# EAGLE board RobotPCB (EAGLE 9.2.2)
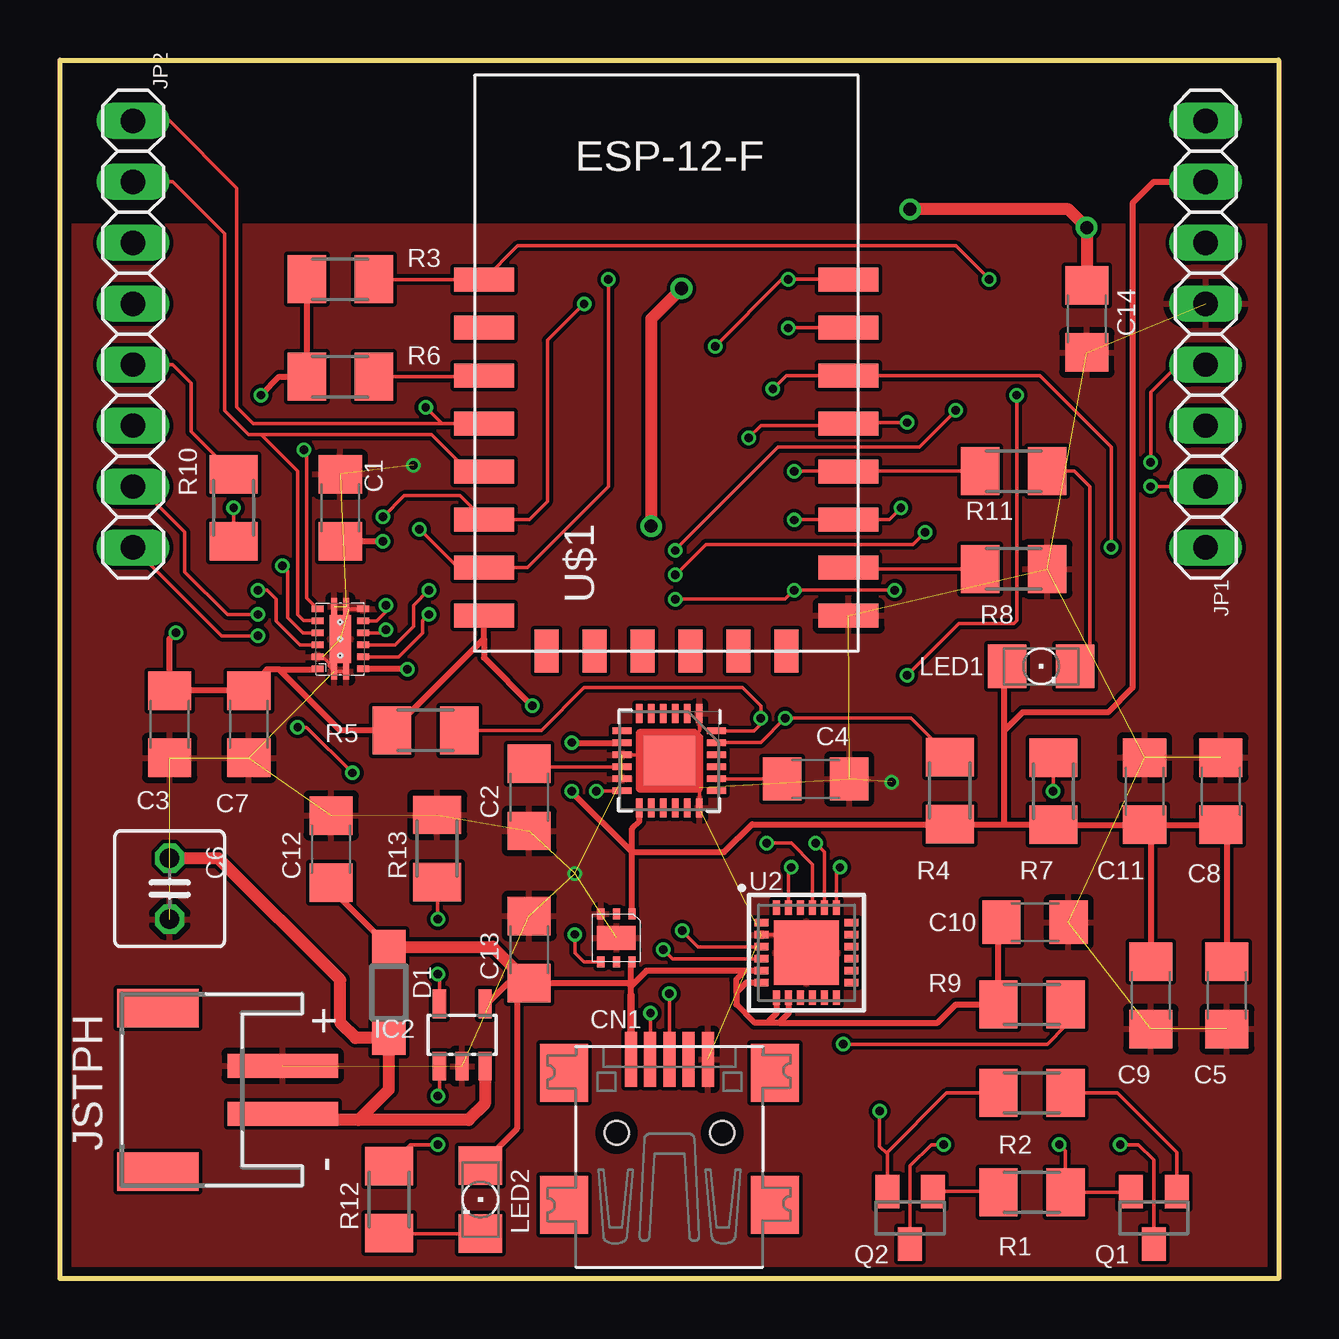
[diagram p0: board, top side]
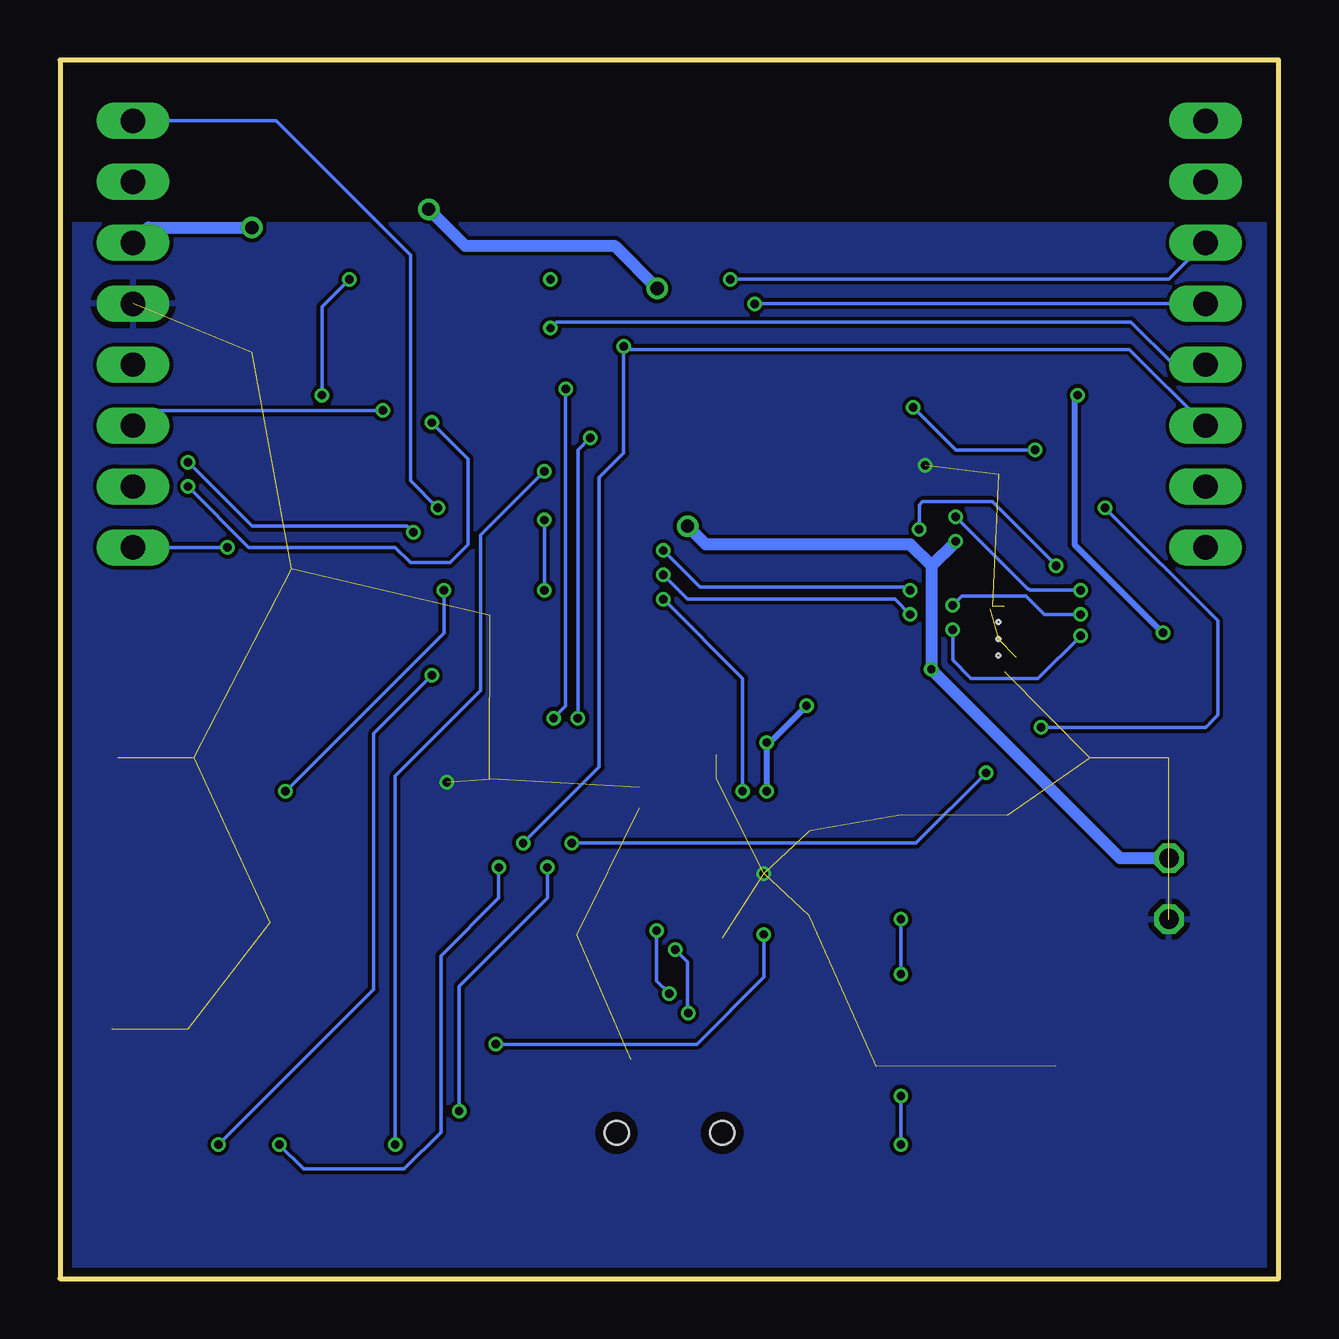
[diagram p1: board, bottom side, seen from below]

Size 50.8 x 50.8 mm. Coordinates in mm from the lower left corner, seen from the top.
Outline: 0,0 0,50.8 50.8,50.8 50.8,0 0,0
Copper layers (1*16): Top 0.035559375mm / dielectric 1.6mm / Bottom 0.035559375mm
Design rules "2layer": minimum track width 6mil, minimum drill 10mil, track to track 6mil, track to pad 6mil, pad to pad 6mil, via to via 6mil, smd to smd 6mil, copper to edge 15mil, drill to drill 6mil, minimum pad ring 5mil, minimum via ring 5mil, stop-mask expansion 2.5mil, vias tented up to drill 0mil, thermal gap 10mil

## Footprints (pad centres in the part's own frame; a part is rotated, then mirrored left to right if it is on the bottom)
C1206 = smd 1.6 x 1.8: 1 -1.4,0; 2 1.4,0
C025-050X050 = drill 0.813 octagon: 1 -1.27,0; 2 1.27,0
USB-MINIB = smd 0.5 x 2.308: D+ 0,4.064; D- -0.8,4.064; GND 1.6,4.064; ID 0.8,4.064; VBUS -1.6,4.064 | smd 2 x 2.4: GND1 -4.4,-2; GND2 -4.4,3.5; GND3 4.4,3.5; GND4 4.4,-2 | hole 1: -2.2,1; 2.2,1
SOD123 = smd 1.4 x 1.4: A 1.9,0; C -1.9,0
QFN50P400X400X95-25T265X275N = smd 0.26 x 0.79: 1 -1.25,-1.97; 2 -0.75,-1.97; 3 -0.25,-1.97; 4 0.25,-1.97; 5 0.75,-1.97; 6 1.25,-1.97; 13 1.25,1.97; 14 0.75,1.97; 15 0.25,1.97; 16 -0.25,1.97; 17 -0.75,1.97; 18 -1.25,1.97 | smd 0.79 x 0.26: 7 1.97,-1.25; 8 1.97,-0.75; 9 1.97,-0.25; 10 1.97,0.25; 11 1.97,0.75; 12 1.97,1.25; 19 -1.97,1.25; 20 -1.97,0.75; 21 -1.97,0.25; 22 -1.97,-0.25; 23 -1.97,-0.75; 24 -1.97,-1.25 | smd 2.15 x 2.05: 25 0,0
SOT23-5L = smd 0.55 x 1.2: 1 -0.95,-1.3; 2 0,-1.3; 3 0.95,-1.3; 4 0.95,1.3; 5 -0.95,1.3
1X08 = drill 1.016 long: 1 -8.89,0; 2 -6.35,0; 3 -3.81,0; 4 -1.27,0; 5 1.27,0; 6 3.81,0; 7 6.35,0; 8 8.89,0
JST-PH-2-SMT-RA = smd 1 x 4.6: 1 1,-3.7; 2 -1,-3.7 | smd 1.6 x 3.4: NC1 -3.4,1.5; NC2 3.4,1.5
1206 = smd 1.6 x 1.803: A -1.422,0; C 1.422,0
SOT23 = smd 1 x 1.4: 1 -0.95,-1.1; 2 0.95,-1.1; 3 0,1.1
M1206 = smd 1.6 x 2: 1 -1.4,0; 2 1.4,0
WSON_2X3 = smd 0.28 x 0.5: 1 -1.25,-0.95; 2 -0.75,-0.95; 3 -0.25,-0.95; 4 0.25,-0.95; 5 0.75,-0.95; 6 1.25,-0.95; 7 1.25,0.95; 8 0.75,0.95; 9 0.25,0.95; 10 -0.25,0.95; 11 -0.75,0.95; 12 -1.25,0.95 | smd 2 x 0.9: PAD 0,0 | smd 0.7 x 0.25: PAD1 -1.35,0.25; PAD2 -1.35,-0.25; PAD3 1.35,-0.25; PAD4 1.35,0.25 | hole 0.15: 0,0; -0.7,0; 0.7,0
QFN-24-4X4 = smd 0.6 x 0.3: 1 -1.875,1.25; 2 -1.875,0.75; 3 -1.875,0.25; 4 -1.875,-0.25; 5 -1.875,-0.75; 6 -1.875,-1.25; 13 1.875,-1.25; 14 1.875,-0.75; 15 1.875,-0.25; 16 1.875,0.25; 17 1.875,0.75; 18 1.875,1.25 | smd 0.3 x 0.6: 7 -1.25,-1.875; 8 -0.75,-1.875; 9 -0.25,-1.875; 10 0.25,-1.875; 11 0.75,-1.875; 12 1.25,-1.875; 19 1.25,1.875; 20 0.75,1.875; 21 0.25,1.875; 22 -0.25,1.875; 23 -0.75,1.875; 24 -1.25,1.875 | smd 2.7 x 2.7: PAD 0,0
ESP8266-ESP12 = smd 2.5 x 1: 1 0.4,15.48; 2 0.4,13.48; 3 0.4,11.48; 4 0.4,9.48; 5 0.4,7.48; 6 0.4,5.48; 7 0.4,3.48; 8 0.4,1.48; 15 15.6,1.48; 16 15.6,3.48; 17 15.6,5.48; 18 15.6,7.48; 19 15.6,9.48; 20 15.6,11.48; 21 15.6,13.48; 22 15.6,15.48 | smd 1 x 1.8: 9 3,0; 10 5,0; 11 7,0; 12 9,0; 13 11,0; 14 13,0
WSON-6 = smd 0.45 x 0.3: 1 0,1.65; 2 0,1; 3 0,0.35; 4 2,0.35; 5 2,1; 6 2,1.65 | smd 1 x 1.6: 7 1,1

## Placement (x,y rotation side)
C1  0.1 uF  [C1206]  11.68,32.13 90 top
C2  0.1 uF  [C1206]  19.56,20.07 270 top
C3  0.1 uF  [C1206]  4.57,23.11 270 top
C4  2.2 nF  [C1206]  31.5,20.83 0 top
C5  0.1 uF  [C1206]  48.64,11.81 270 top
C6  1.0 uF  [C025-050X050]  4.57,16.26 270 top
C7  10 nF  [C1206]  7.87,23.11 270 top
C8  0.1 uF  [C1206]  48.39,20.32 90 top
C9  10 uF  [C1206]  45.47,11.81 270 top
C10  1 uF  [C1206]  40.64,14.86 0 top
C11  1 uF  [C1206]  45.21,20.32 90 top
C12  1 uF  [C1206]  11.3,17.91 90 top
C13  10 uF  [C1206]  19.56,13.72 90 top
C14  10 uF  [C1206]  42.8,40.01 270 top
CN1  [USB-MINIB]  25.4,5.08 0 top
D1  MBR120HW  [SOD123]  13.72,11.94 270 top
IC1  MPU6050  [QFN50P400X400X95-25T265X275N]  25.4,21.59 180 top
IC2  MCP73831/OT  [SOT23-5L]  16.76,10.16 0 top
JP1  [1X08]  47.75,39.37 90 top
JP2  [1X08]  3.05,39.37 270 top
JSTPH  [JST-PH-2-SMT-RA]  5.59,7.87 90 top
LED1  [1206]  40.89,25.53 0 top
LED2  [1206]  17.53,3.3 270 top
Q1  [SOT23]  45.59,2.54 180 top
Q2  [SOT23]  35.43,2.54 180 top
R1  10ki  [M1206]  40.51,3.61 0 top
R2  10k  [M1206]  40.51,7.75 180 top
R3  10k  [M1206]  11.68,41.66 180 top
R4  3.3K  [M1206]  37.08,20.35 270 top
R5  3.3K  [M1206]  15.24,22.86 180 top
R6  10k  [M1206]  11.68,37.59 180 top
R7  10k  [M1206]  41.4,20.32 90 top
R8  4.7k  [M1206]  39.75,29.59 180 top
R9  10k  [M1206]  40.51,11.43 0 top
R10  1k  [M1206]  7.24,32.13 90 top
R11  1k  [M1206]  39.75,33.66 180 top
R12  1k  [M1206]  13.72,3.3 90 top
R13  2k  [M1206]  15.72,17.93 90 top
U1  DRV8835  [WSON_2X3]  11.68,26.67 90 top
U2  CP2104-F03-GM  [QFN-24-4X4]  31.11,13.59 0 top
U$1  ESP8266_ESP-12  [ESP8266-ESP12]  17.27,26.16 0 top
U$2  TLV757P  [WSON-6]  22.19,15.21 270 top

## Library data of the parts
C1-C14 = rcl; SPICEPREFIX: C
CN1 IC2 JSTPH LED1 = adafruit
D1 = diode
IC1 = invensense
JP1 JP2 = pinhead
LED2 = led
Q1 Q2 = semicon-smd-ipc
R1-R13 = rcl; SPICEPREFIX: R
U1 = bt_motordriver
U2 = silicon_labs
U$1 = ESP8266-ESP12
U$2 = ECE5780-MotorDriver

## Nets
ADC: U$1.2
DTR: Q2.2 R2.2 U2.23
EN: R6.1 U$1.3
GND: C1.2 C2.2 C3.2 C4.2 C5.2 C6.2 C7.2 C8.2 C9.2 C10.2 C11.2 C12.2 C13.2 C14.2 CN1.GND IC1.1 IC1.9 IC1.11 IC1.18 IC1.25 IC2.2 JP1.5 JSTPH.1 R8.1 R13.2 U1.6 U1.11 U1.PAD U1.PAD1 U1.PAD2 U1.PAD3 U1.PAD4 U2.2 U2.PAD U$1.15 U$2.3 U$2.7
GPIO0: Q2.3 R11.2 U$1.18
GPIO2: IC1.12 JP1.8 R7.2 U$1.17
GPIO4: IC1.24 JP1.2 R5.1 U$1.19
GPIO5: IC1.23 JP1.1 R4.1 U$1.20
GPIO12: JP2.4 U1.10 U$1.6
GPIO13: JP2.3 U1.9 U$1.7
GPIO14: JP2.2 U1.8 U$1.5
GPIO16: JP2.1 U1.7 U$1.4
MOUTA1: JP1.4 U1.2
MOUTA2: JP1.3 U1.3
MOUTB1: JP2.8 U1.4
MOUTB2: JP2.7 U1.5
N$1: C4.1 IC1.20
N$2: Q1.1 R2.1
N$3: R9.2 U$2.4
N$4: CN1.D+ U2.3
N$5: Q2.1 R1.1
N$7: CN1.D- U2.4
N$8: LED1.C R11.1
N$9: IC2.5 R13.1
N$10: IC2.1 R12.2
N$11: LED2.C R12.1
N$23: R8.2 U$1.16
REGOUT: C2.1 IC1.10
RESET: Q1.3 R3.1 U$1.1
RTS: Q1.2 R1.2 U2.19
RXD: JP2.5 R10.2 U$1.21
TXD: JP2.6 U2.20 U$1.22
USB_RX: R10.1 U2.21
VBAT: C1.1 C6.1 C14.1 D1.A IC2.3 JP1.6 JSTPH.2 U1.1
VBUS: C10.1 C12.1 C13.1 CN1.VBUS D1.C IC2.4 LED2.A R9.1 U2.5 U2.6 U2.7 U2.8 U$2.6
VCC: C3.1 C5.1 C7.1 C8.1 C9.1 C11.1 IC1.8 IC1.13 JP1.7 LED1.A R3.2 R4.2 R5.2 R6.2 R7.1 U1.12 U$1.8 U$2.1

## Tracks (layer width: path | path; a pad name or v marks a point on that pad's centre or on a via)
DTR  (via drill 0.35)
  Top 0.152: R2.2 36.96,7.75 34.48,5.27 34.48,5.21 | U2.23 30.36,17.03 v30.48,17.14 | v34.16,6.99 34.16,5.53 34.48,5.21 | 34.48,5.21 Q2.2
  Bottom 0.152: v30.48,17.14 30.48,15.88 34.16,12.19 v34.16,6.99
EN
  Top 0.152: R6.1 17.62,37.59 U$1.3
GND  (via drill 0.35)  (32 unrouted)
  Top 0.152: IC1.9 25.15,21.84 IC1.25 25.46,21.65 | IC1.1 26.65,22.84 25.46,21.65 | IC1.18 26.65,20.47 25.46,21.65 | U2.2 30.36,14.34 U2.PAD | U1.11 10.95,25.92 11.21,25.66 11.21,25.54 U1.PAD1 U1.PAD2 | U1.6 12.03,27.92 U1.PAD3
  other vias: 34.67,20.7 21.46,16.89 14.73,33.91
  pour Top: 0,0 0,43.94 50.8,43.94 50.8,0
  pour Bottom: 0,0 0,43.94 50.8,43.94 50.8,0
GPIO0  (via drill 0.35)
  Top 0.152: v36.83,5.59 36.32,5.59 35.43,4.7 Q2.3 | R11.2 32.88,33.66 U$1.18 32.86,33.66 v30.61,33.66
  Bottom 0.152: v36.83,5.59 36.83,20.95 33.27,24.51 33.27,30.99 v30.61,33.66
GPIO2  (via drill 0.35)
  Top 0.152: IC1.12 22.37,20.34 v22.35,20.32 | v35.05,32.13 34.56,31.64 U$1.17 30.63,31.64 v30.61,31.62 | R7.2 v41.4,20.32 | v25.65,28.32 30.23,28.32 v30.61,28.7 v34.8,28.7
  Bottom 0.152: v35.05,32.13 36.2,33.27 36.2,42.67 41.78,48.26 JP1.8 | v22.35,20.32 22.35,25.02 v25.65,28.32 | v30.61,28.7 v30.61,31.62 | v41.4,20.32 34.8,26.92 v34.8,28.7
GPIO4  (via drill 0.35)
  Top 0.152: IC1.24 28.94,22.84 29.21,23.11 v29.21,23.37 29.21,23.88 28.45,24.64 21.84,24.64 20.07,22.86 R5.1 | v28.7,35.05 29.21,35.56 32.79,35.56 U$1.19 32.92,35.69 v35.31,35.69 | JP1.2 v45.47,33.02
  Bottom 0.152: v28.7,35.05 29.21,34.54 v29.21,23.37 | v45.47,33.02 42.93,30.48 36.83,30.48 36.2,29.84 34.54,29.84 33.78,30.61 33.78,34.16 v35.31,35.69
GPIO5  (via drill 0.35)
  Top 0.152: IC1.23 27.38,22.35 29.21,22.35 v30.23,23.37 35.46,23.37 R4.1 | v29.72,37.08 30.28,37.64 U$1.20 40.84,37.64 43.81,34.67 v43.81,30.48
  Bottom 0.152: v29.72,37.08 29.72,23.88 v30.23,23.37 | v43.81,30.48 JP1.1
GPIO12  (via drill 0.35)
  Top 0.152: U1.10 10.01,26.42 9.02,27.42 9.02,28.32 8.64,28.7 v8.26,28.7 | v13.46,31.75 14.35,32.64 16.68,32.64 U$1.6 19.58,31.64 20.32,32.38 20.32,39.12 v21.84,40.64
  Bottom 0.152: v8.26,28.7 10.36,28.7 10.41,28.75 10.46,28.75 v13.46,31.75 | JP2.4 v21.84,40.64
GPIO13  (via drill 0.35)
  Top 0.152: U1.9 10.48,26.92 10.13,26.92 9.49,27.57 9.49,29.5 v9.27,29.72 | v14.99,31.24 16.59,29.64 U$1.7 19.48,29.64 22.86,33.02 v22.86,41.66
  Bottom 0.152: v9.27,29.72 11.94,32.38 14.86,32.38 14.99,32.26 v14.99,31.24 | JP2.3 4.57,41.66 v22.86,41.66
GPIO14
  Top 0.152: JP2.2 4.7,45.72 6.86,43.56 6.86,36.2 7.87,35.18 8.38,35.18 | 8.38,35.18 15.49,35.18 17.03,33.64 U$1.5 | U1.8 10.72,27.43 10.16,27.43 9.91,27.69 9.91,33.66 8.38,35.18
GPIO16  (via drill 0.35)
  Top 0.152: JP2.1 4.57,48.26 7.37,45.47 7.37,36.32 8.05,35.64 15.92,35.64 | U1.7 10.29,28.37 10.29,34.42 v10.16,34.54 | v15.24,36.32 15.92,35.64 | 15.92,35.64 U$1.4
  Bottom 0.152: v10.16,34.54 13.46,34.54 v15.24,36.32
MOUTA1  (via drill 0.35)
  Top 0.152: U1.2 14.12,25.92 15.12,26.92 15.12,27.44 v15.37,27.69 | v36.07,31.11 35.56,30.61 26.92,30.61 v25.65,29.34 | v45.47,34.04 45.47,36.96 46.61,38.1 JP1.4
  Bottom 0.152: v15.37,27.69 16,28.32 24.64,28.32 v25.65,29.34 | v36.07,31.11 36.32,31.37 42.8,31.37 v45.47,34.04
MOUTA2  (via drill 0.35)
  Top 0.152: U1.3 13.97,26.42 14.73,27.18 14.73,28.07 v15.37,28.7 | v25.65,30.35 25.65,30.4 29.92,34.67 35.81,34.67 v37.34,36.2
  Bottom 0.152: v15.37,28.7 15.49,28.83 24.13,28.83 v25.65,30.35 | JP1.3 47.12,36.2 v37.34,36.2
MOUTB1  (via drill 0.35)
  Top 0.152: JP2.8 6.73,26.8 v8.26,26.8 | v13.59,27.05 13.59,26.92 U1.4
  Bottom 0.152: v8.26,26.8 10.03,25.02 12.83,25.02 13.59,25.78 v13.59,27.05
MOUTB2  (via drill 0.35)
  Top 0.152: JP2.7 3.3,33.02 5.21,31.11 5.21,29.46 6.99,27.69 v8.26,27.69 | v13.59,28.07 13.59,27.81 13.2,27.42 U1.5
  Bottom 0.152: v8.26,27.69 9.78,27.69 10.54,28.45 13.21,28.45 v13.59,28.07
N$1
  Top 0.152: IC1.20 C4.1
N$2
  Top 0.152: R2.1 44.07,7.75 46.54,5.27 Q1.1
N$3  (via drill 0.35)
  Top 0.152: U$2.4 21.84,13.21 21.46,13.59 v21.46,14.35 | v32.64,9.78 41.15,9.78 41.91,10.54 R9.2
  Bottom 0.152: v21.46,14.35 21.46,12.57 24.26,9.78 v32.64,9.78
N$4  (via drill 0.35)
  Top 0.152: U2.3 26.6,13.84 v25.93,14.5 | v25.4,11.89 CN1.D+
  Bottom 0.152: v25.93,14.5 25.93,12.42 v25.4,11.89
N$5
  Top 0.152: Q2.1 39.08,3.64 R1.1
N$7  (via drill 0.35)
  Top 0.152: U2.4 25.52,13.34 v25.15,13.72 | v24.61,11.07 24.61,9.16 CN1.D-
  Bottom 0.152: v25.15,13.72 24.64,13.21 24.64,11.1 v24.61,11.07
N$8
  Top 0.152: LED1.C 42.93,26.14 42.93,33.02 42.29,33.66 R11.1
N$9  (via drill 0.35)
  Top 0.152: v15.75,12.7 15.81,12.63 IC2.5 | v15.75,14.99 15.75,16.51 R13.1
  Bottom 0.152: v15.75,14.99 v15.75,12.7
N$10  (via drill 0.35)
  Top 0.152: R12.2 14.6,5.59 v15.75,5.59 | v15.75,7.62 15.81,7.69 IC2.1
  Bottom 0.152: v15.75,5.59 v15.75,7.62
N$11
  Top 0.152: R12.1 13.74,1.88 LED2.C
N$23
  Top 0.152: R8.2 32.92,29.59 U$1.16
REGOUT
  Top 0.152: IC1.10 19.69,21.34 C2.1
RESET  (via drill 0.35)
  Top 0.152: Q1.3 45.59,4.95 44.96,5.59 v44.2,5.59 | R3.1 13.1,41.64 U$1.1 19.08,43.05 37.34,43.05 v38.73,41.66 | v35.31,25.15 37.47,27.3 39.75,27.3 39.88,27.43 v39.88,36.83
  Bottom 0.152: v44.2,5.59 37.72,12.06 37.72,22.73 v35.31,25.15 | v39.88,36.83 39.88,40.51 v38.73,41.66
RTS  (via drill 0.35)
  Top 0.152: v41.66,5.59 41.91,5.33 R1.2 44.61,3.61 Q1.2 | U2.19 32.37,17 v32.51,17.14
  Bottom 0.152: v41.66,5.59 40.64,4.57 36.45,4.57 34.92,6.1 34.92,13.46 32.51,15.88 v32.51,17.14
RXD  (via drill 0.35)
  Top 0.152: U$1.21 30.37,39.64 v30.35,39.62 | R10.2 5.46,35.31 5.46,37.34 4.7,38.1 JP2.5
  Bottom 0.152: JP2.5 4.38,38.1 6.16,39.88 30.1,39.88 v30.35,39.62
TXD  (via drill 0.35)
  Top 0.152: U2.20 31.86,17.79 v31.5,18.16 | U$1.22 32.86,41.66 v30.35,41.66 30.1,41.66 v27.3,38.86
  Bottom 0.152: JP2.6 6.22,38.73 27.18,38.73 v27.3,38.86 27.3,34.42 28.32,33.4 28.32,21.34 v31.5,18.16
USB_RX  (via drill 0.35)
  Top 0.152: U2.21 31.36,17.28 30.48,18.16 v29.46,18.16 | v12.19,21.08 10.29,22.99 v9.91,22.99 | v7.24,32.13 R10.1
  Bottom 0.152: v29.46,18.16 15.11,18.16 v12.19,21.08 | v9.91,22.99 3.05,22.99 2.54,23.5 2.54,27.43 v7.24,32.13
VBAT  (via drill 0.35, 0.55 pad 0.9)
  Top 0.254: v14.48,25.4 14.46,25.42 U1.1 | v13.46,30.73 C1.1
  Top 0.508: JSTPH.2 9.54,6.62 12.45,6.62 | IC2.3 17.71,7.3 17.03,6.62 12.45,6.62 | 12.45,6.62 13.72,7.89 D1.A 12.31,10.04 11.68,10.67 11.68,12.45 6.6,17.53 C6.1 | C14.1 v42.8,43.81 42.04,44.58 v35.43,44.58 | v25.91,41.27 24.64,40.01 v24.64,31.37
  Bottom 0.508: C6.1 6.6,17.53 v14.48,25.4 14.48,29.72 | 14.48,29.72 v13.46,30.73 | JP1.6 47.12,43.81 v42.8,43.81 | v35.43,44.58 33.91,43.05 27.69,43.05 v25.91,41.27 | 14.48,29.72 15.37,30.61 23.88,30.61 v24.64,31.37
VBUS
  Top 0.152: 23.8,13.16 U$2.6 | C13.1 19.05,11.81 | 39.11,14.73 C10.1
  Top 0.203: 23.8,12.19 23.68,12.32
  Top 0.254: U2.8 30.36,11.06 29.97,10.67 | U2.7 29.86,11.07 29.46,10.67 | 29.97,10.67 29.46,10.67 | 29.46,10.67 28.96,10.67 28.19,11.43 28.19,11.94 | 28.19,11.94 28.19,12.45 28.18,12.46 28.56,12.84 | U2.6 28.59,12.34 28.19,11.94 | U2.5 28.56,12.84 | 23.8,11.81 23.8,12.19 | 23.8,12.19 23.8,13.16 | 28.56,12.84 24.45,12.84 23.8,12.19 | IC2.4 17.81,11.46 18.67,12.32 C13.1 23.68,12.32 | LED2.A 19.05,6.25 19.05,11.81 | 29.97,10.67 36.58,10.67 37.34,11.43 R9.1 39.11,14.73 | D1.C 11.3,16.25 C12.1
  Top 0.305: CN1.VBUS 23.8,11.81
  Top 0.508: D1.C 18.04,13.84 C13.1
VCC  (via drill 0.35)
  Top 0.254: U$2.1 23.84,17.78 | 23.84,17.78 23.84,18.76 24.15,19.07 IC1.13 | 23.84,17.78 21.3,20.32 v21.34,20.32 | v21.34,22.35 v21.35,22.34 IC1.8 | 9.14,25.4 11.68,22.86 R5.2 17.67,26.69 | 9.14,25.4 10.71,25.4 U1.12 | 23.84,17.78 27.69,17.78 28.85,18.95 R4.2 39.37,18.95 | 39.37,18.95 41.38,18.95 R7.1 C11.1 | C11.1 C8.1 48.64,18.67 C5.1 | C11.1 45.47,18.67 C9.1 | 39.37,18.95 39.37,22.86 | 39.37,22.86 39.37,25.43 LED1.A | 39.37,22.86 40.13,23.62 43.69,23.62 44.7,24.64 44.7,44.83 45.59,45.72 JP1.7 | 9.14,25.4 8.63,25.4 C7.1 C3.1 4.57,26.67 v4.83,26.92 | R3.2 R6.2 9.14,37.59 v8.38,36.83 | 17.67,26.69 U$1.8 | 17.67,26.69 17.67,25.89 v19.68,23.88
  Bottom 0.254: v21.34,20.32 v21.34,22.35 21.21,22.35 v19.68,23.88 | v4.83,26.92 8.51,30.61 8.51,36.7 v8.38,36.83